# Altium PCB pay-optical-testing.PcbDoc (part 1 of 2)
Units mil, origin at the board's own origin, x right, y up, seen from the top; angles counter-clockwise.
Board outline 6000 x 4000 mil, 2 copper layers (Top Layer, Bottom Layer); 469 components, 250 nets, 1335 pads, 34 vias.
Unrouted connection lines stored in the file: 1082.
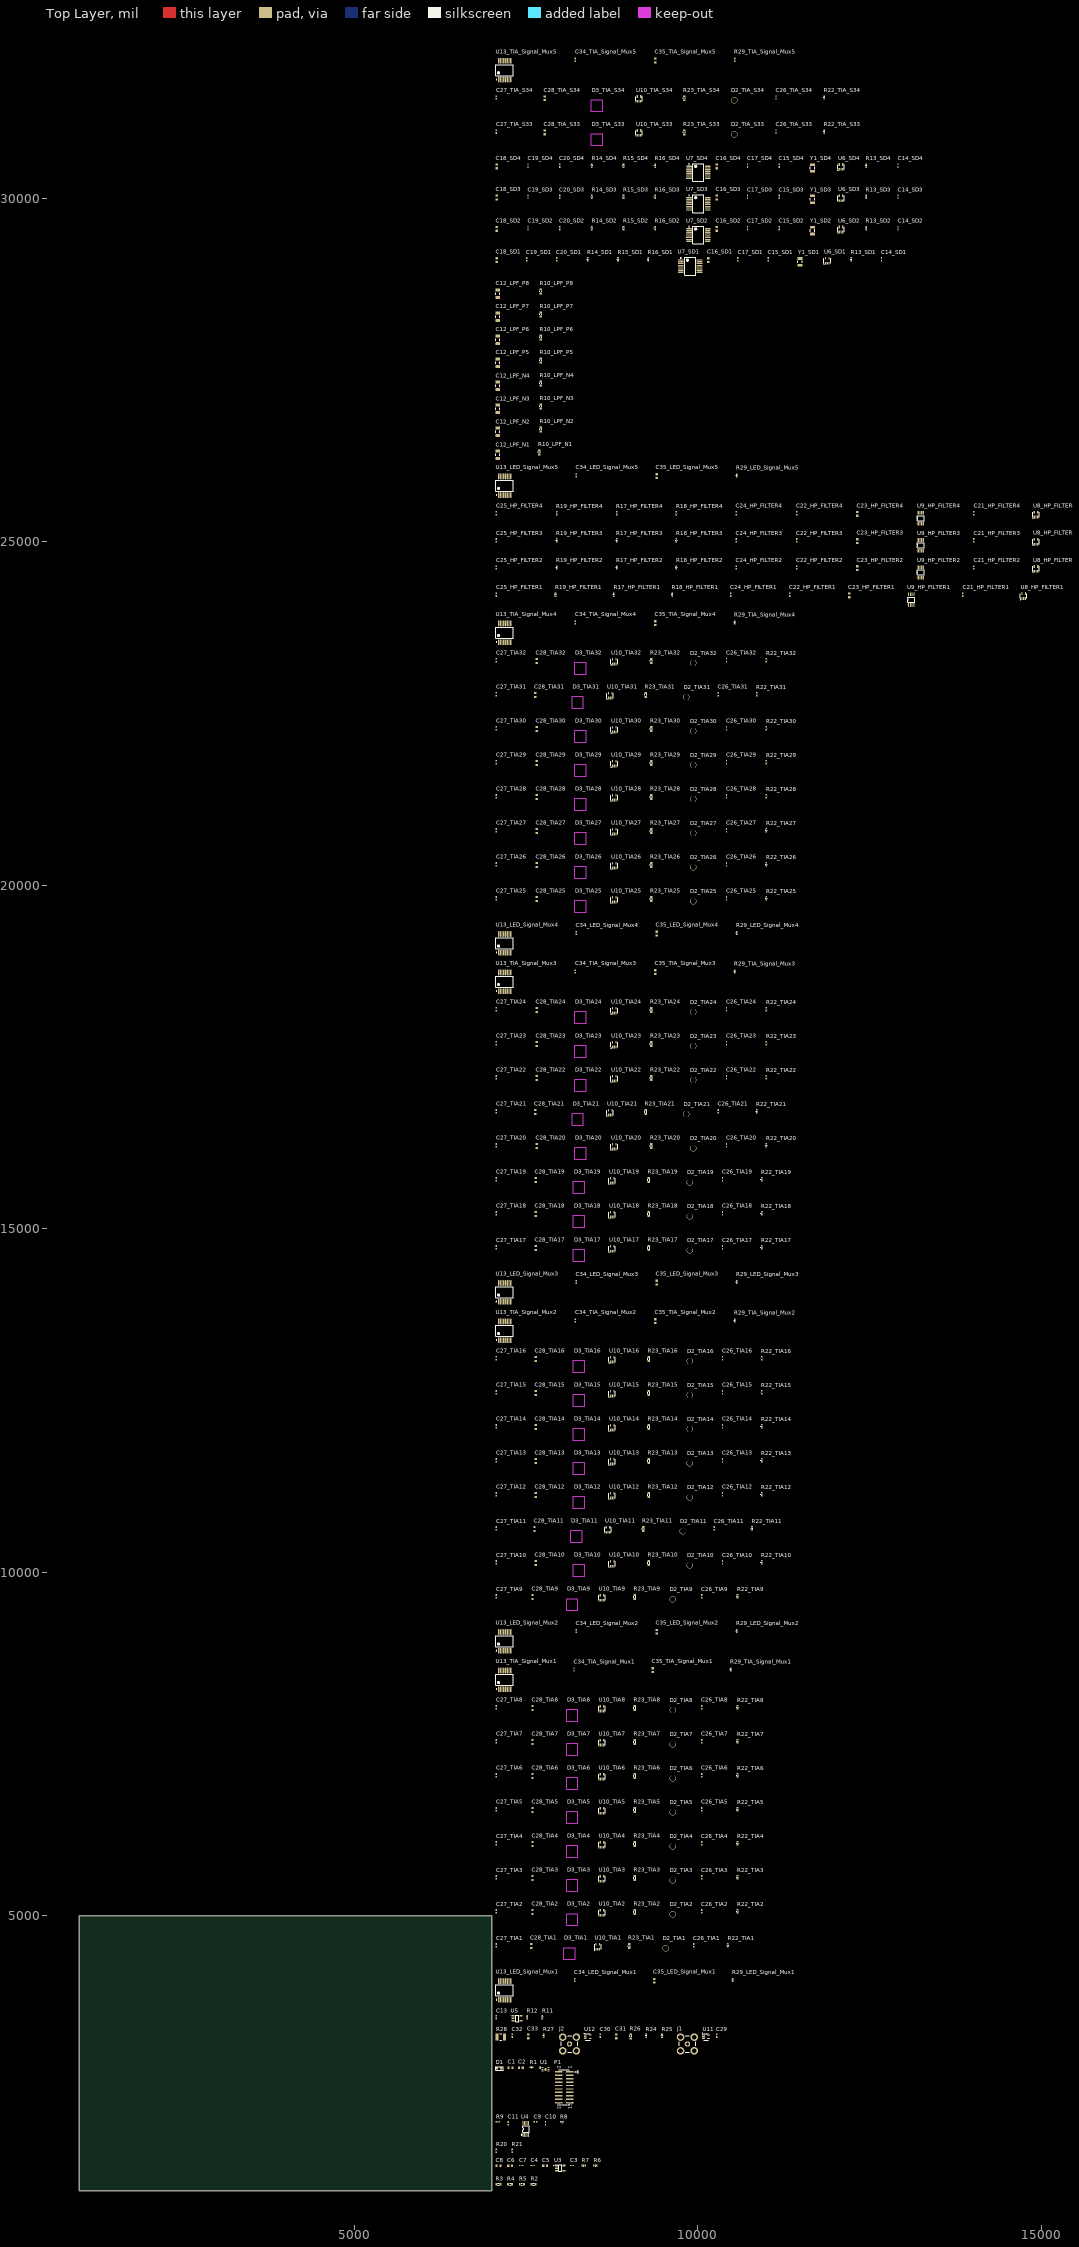
[diagram p0: Top Layer view]
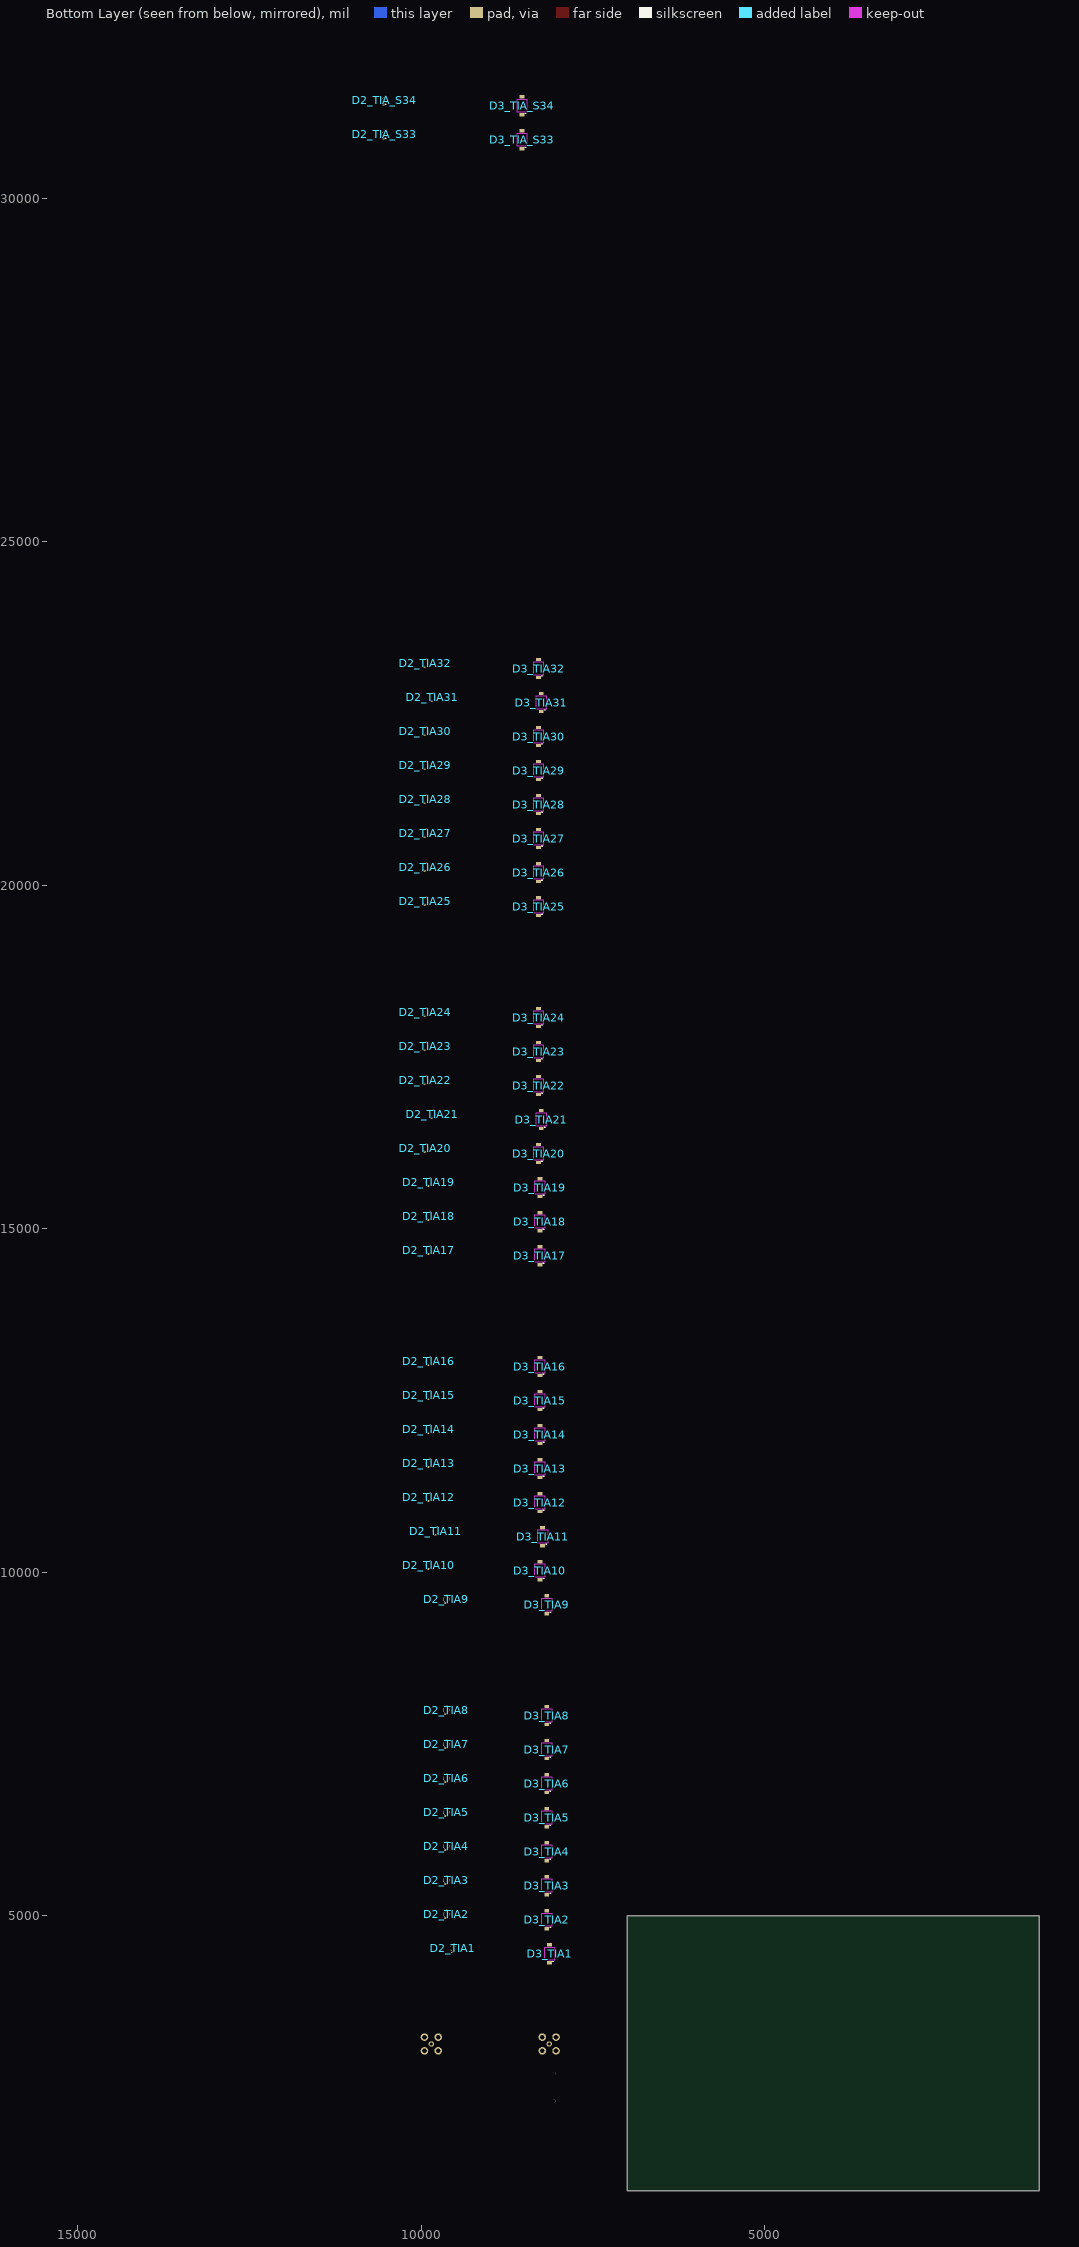
[diagram p1: Bottom Layer view, seen from below]

## Layer stack, top to bottom
Top Solder: solder mask 0.4, Solder Resist, Dk 3.5
Top Layer: signal copper 1.4
Dielectric 1: dielectric 12.6, FR-4, Dk 4.8
Bottom Layer: signal copper 1.4
Bottom Solder: solder mask 0.4, Solder Resist, Dk 3.5

## Board outline
1000,1000 7000,1000 7000,5000 1000,5000

## Design rules (kind name [scope] priority, off if disabled: settings)
Clearance [All] p1: gap=10 ignorepadtopadclearanceinfootprint=FALSE except(0: Arc-Hole Track-Hole SMDPad-Hole THPad-Hole Via-Hole Fill-Hole Poly-Hole Region-Hole Text-Hole)
PolygonConnect [All] p1: connectstyle=Relief reliefconductorwidth=10 reliefentries=4 polygonreliefangle="90 Angle" airgapwidth=10
RoomDefinition TIA_Signal_Mux5 [InComponentClass('TIA_Signal_Mux5')] p1: confinementstyle=ConfineIn formatcopy=TRUE lockcomponents=FALSE outline 7045,31670 11640,31670 11640,32180 7045,32180
RoomDefinition TIA_Signal_Mux4 [InComponentClass('TIA_Signal_Mux4')] p2: confinementstyle=ConfineIn formatcopy=TRUE lockcomponents=FALSE outline 7045,23480 11640,23480 11640,23990 7045,23990
RoomDefinition TIA_Signal_Mux3 [InComponentClass('TIA_Signal_Mux3')] p3: confinementstyle=ConfineIn formatcopy=TRUE lockcomponents=FALSE outline 7045,18400 11640,18400 11640,18910 7045,18910
RoomDefinition TIA_Signal_Mux2 [InComponentClass('TIA_Signal_Mux2')] p4: confinementstyle=ConfineIn formatcopy=TRUE lockcomponents=FALSE outline 7045,13320 11640,13320 11640,13830 7045,13830
RoomDefinition TIA_Signal_Mux1 [InComponentClass('TIA_Signal_Mux1')] p5: confinementstyle=ConfineIn formatcopy=TRUE lockcomponents=FALSE outline 7045,8240 11560,8240 11560,8750 7045,8750
RoomDefinition TIA_S34 [InComponentClass('TIA_S34')] p6: confinementstyle=ConfineIn formatcopy=TRUE lockcomponents=FALSE outline 7045,31180 12480,31180 12480,31620 7045,31620
RoomDefinition TIA_S33 [InComponentClass('TIA_S33')] p7: confinementstyle=ConfineIn formatcopy=TRUE lockcomponents=FALSE outline 7045,30685 12480,30685 12480,31125 7045,31125
RoomDefinition TIA32 [InComponentClass('TIA32')] p8: confinementstyle=ConfineIn formatcopy=TRUE lockcomponents=FALSE outline 7045,22990 11520,22990 11520,23430 7045,23430
RoomDefinition TIA31 [InComponentClass('TIA31')] p9: confinementstyle=ConfineIn formatcopy=TRUE lockcomponents=FALSE outline 7045,22495 11360,22495 11360,22935 7045,22935
RoomDefinition TIA30 [InComponentClass('TIA30')] p10: confinementstyle=ConfineIn formatcopy=TRUE lockcomponents=FALSE outline 7045,22000 11520,22000 11520,22440 7045,22440
RoomDefinition TIA29 [InComponentClass('TIA29')] p11: confinementstyle=ConfineIn formatcopy=TRUE lockcomponents=FALSE outline 7045,21505 11520,21505 11520,21945 7045,21945
RoomDefinition TIA28 [InComponentClass('TIA28')] p12: confinementstyle=ConfineIn formatcopy=TRUE lockcomponents=FALSE outline 7045,21010 11520,21010 11520,21450 7045,21450
RoomDefinition TIA27 [InComponentClass('TIA27')] p13: confinementstyle=ConfineIn formatcopy=TRUE lockcomponents=FALSE outline 7045,20515 11520,20515 11520,20955 7045,20955
RoomDefinition TIA26 [InComponentClass('TIA26')] p14: confinementstyle=ConfineIn formatcopy=TRUE lockcomponents=FALSE outline 7045,20020 11520,20020 11520,20460 7045,20460
RoomDefinition TIA25 [InComponentClass('TIA25')] p15: confinementstyle=ConfineIn formatcopy=TRUE lockcomponents=FALSE outline 7045,19525 11520,19525 11520,19965 7045,19965
RoomDefinition TIA24 [InComponentClass('TIA24')] p16: confinementstyle=ConfineIn formatcopy=TRUE lockcomponents=FALSE outline 7045,17910 11520,17910 11520,18350 7045,18350
RoomDefinition TIA23 [InComponentClass('TIA23')] p17: confinementstyle=ConfineIn formatcopy=TRUE lockcomponents=FALSE outline 7045,17415 11520,17415 11520,17855 7045,17855
RoomDefinition TIA22 [InComponentClass('TIA22')] p18: confinementstyle=ConfineIn formatcopy=TRUE lockcomponents=FALSE outline 7045,16920 11520,16920 11520,17360 7045,17360
RoomDefinition TIA21 [InComponentClass('TIA21')] p19: confinementstyle=ConfineIn formatcopy=TRUE lockcomponents=FALSE outline 7045,16425 11360,16425 11360,16865 7045,16865
RoomDefinition TIA20 [InComponentClass('TIA20')] p20: confinementstyle=ConfineIn formatcopy=TRUE lockcomponents=FALSE outline 7045,15930 11520,15930 11520,16370 7045,16370
RoomDefinition TIA19 [InComponentClass('TIA19')] p21: confinementstyle=ConfineIn formatcopy=TRUE lockcomponents=FALSE outline 7045,15435 11440,15435 11440,15875 7045,15875
RoomDefinition TIA18 [InComponentClass('TIA18')] p22: confinementstyle=ConfineIn formatcopy=TRUE lockcomponents=FALSE outline 7045,14940 11440,14940 11440,15380 7045,15380
RoomDefinition TIA17 [InComponentClass('TIA17')] p23: confinementstyle=ConfineIn formatcopy=TRUE lockcomponents=FALSE outline 7045,14445 11440,14445 11440,14885 7045,14885
RoomDefinition TIA16 [InComponentClass('TIA16')] p24: confinementstyle=ConfineIn formatcopy=TRUE lockcomponents=FALSE outline 7045,12830 11440,12830 11440,13270 7045,13270
RoomDefinition TIA15 [InComponentClass('TIA15')] p25: confinementstyle=ConfineIn formatcopy=TRUE lockcomponents=FALSE outline 7045,12335 11440,12335 11440,12775 7045,12775
RoomDefinition TIA14 [InComponentClass('TIA14')] p26: confinementstyle=ConfineIn formatcopy=TRUE lockcomponents=FALSE outline 7045,11840 11440,11840 11440,12280 7045,12280
RoomDefinition TIA13 [InComponentClass('TIA13')] p27: confinementstyle=ConfineIn formatcopy=TRUE lockcomponents=FALSE outline 7045,11345 11440,11345 11440,11785 7045,11785
RoomDefinition TIA12 [InComponentClass('TIA12')] p28: confinementstyle=ConfineIn formatcopy=TRUE lockcomponents=FALSE outline 7045,10850 11440,10850 11440,11290 7045,11290
RoomDefinition TIA11 [InComponentClass('TIA11')] p29: confinementstyle=ConfineIn formatcopy=TRUE lockcomponents=FALSE outline 7045,10355 11280,10355 11280,10795 7045,10795
RoomDefinition TIA10 [InComponentClass('TIA10')] p30: confinementstyle=ConfineIn formatcopy=TRUE lockcomponents=FALSE outline 7045,9860 11440,9860 11440,10300 7045,10300
RoomDefinition TIA9 [InComponentClass('TIA9')] p31: confinementstyle=ConfineIn formatcopy=TRUE lockcomponents=FALSE outline 7045,9365 11040,9365 11040,9805 7045,9805
RoomDefinition TIA8 [InComponentClass('TIA8')] p32: confinementstyle=ConfineIn formatcopy=TRUE lockcomponents=FALSE outline 7045,7750 11040,7750 11040,8190 7045,8190
RoomDefinition TIA7 [InComponentClass('TIA7')] p33: confinementstyle=ConfineIn formatcopy=TRUE lockcomponents=FALSE outline 7045,7255 11040,7255 11040,7695 7045,7695
RoomDefinition TIA6 [InComponentClass('TIA6')] p34: confinementstyle=ConfineIn formatcopy=TRUE lockcomponents=FALSE outline 7045,6760 11040,6760 11040,7200 7045,7200
RoomDefinition TIA5 [InComponentClass('TIA5')] p35: confinementstyle=ConfineIn formatcopy=TRUE lockcomponents=FALSE outline 7045,6265 11040,6265 11040,6705 7045,6705
RoomDefinition TIA4 [InComponentClass('TIA4')] p36: confinementstyle=ConfineIn formatcopy=TRUE lockcomponents=FALSE outline 7045,5770 11040,5770 11040,6210 7045,6210
RoomDefinition TIA3 [InComponentClass('TIA3')] p37: confinementstyle=ConfineIn formatcopy=TRUE lockcomponents=FALSE outline 7045,5275 11040,5275 11040,5715 7045,5715
RoomDefinition TIA2 [InComponentClass('TIA2')] p38: confinementstyle=ConfineIn formatcopy=TRUE lockcomponents=FALSE outline 7045,4780 11040,4780 11040,5220 7045,5220
RoomDefinition TIA1 [InComponentClass('TIA1')] p39: confinementstyle=ConfineIn formatcopy=TRUE lockcomponents=FALSE outline 7045,4285 10880,4285 10880,4725 7045,4725
RoomDefinition "Synchronous Demodulator Circuit" [InComponentClass('Synchronous Demodulator Circuit')] p40: confinementstyle=ConfineIn formatcopy=TRUE lockcomponents=FALSE outline 7045,3445 7880,3445 7880,3670 7045,3670
RoomDefinition "SMA Amp" [InComponentClass('SMA Amp')] p41: confinementstyle=ConfineIn formatcopy=TRUE lockcomponents=FALSE outline 7045,2970 10445,2970 10445,3400 7045,3400
RoomDefinition SD4 [InComponentClass('SD4')] p42: confinementstyle=ConfineIn formatcopy=TRUE lockcomponents=FALSE outline 7045,30230 13315,30230 13315,30630 7045,30630
RoomDefinition SD3 [InComponentClass('SD3')] p43: confinementstyle=ConfineIn formatcopy=TRUE lockcomponents=FALSE outline 7045,29775 13315,29775 13315,30175 7045,30175
RoomDefinition SD2 [InComponentClass('SD2')] p44: confinementstyle=ConfineIn formatcopy=TRUE lockcomponents=FALSE outline 7045,29320 13315,29320 13315,29720 7045,29720
RoomDefinition SD1 [InComponentClass('SD1')] p45: confinementstyle=ConfineIn formatcopy=TRUE lockcomponents=FALSE outline 7045,28865 13055,28865 13055,29265 7045,29265
RoomDefinition pay-optical-toplevel [InComponentClass('pay-optical-toplevel')] p46: confinementstyle=ConfineIn formatcopy=TRUE lockcomponents=FALSE outline 7045,2175 8270,2175 8270,2920 7045,2920
RoomDefinition LPF_P8 [InComponentClass('LPF_P8')] p47: confinementstyle=ConfineIn formatcopy=TRUE lockcomponents=FALSE outline 7045,28520 8290,28520 8290,28810 7045,28810
RoomDefinition LPF_P7 [InComponentClass('LPF_P7')] p48: confinementstyle=ConfineIn formatcopy=TRUE lockcomponents=FALSE outline 7045,28185 8290,28185 8290,28475 7045,28475
RoomDefinition LPF_P6 [InComponentClass('LPF_P6')] p49: confinementstyle=ConfineIn formatcopy=TRUE lockcomponents=FALSE outline 7045,27850 8290,27850 8290,28140 7045,28140
RoomDefinition LPF_P5 [InComponentClass('LPF_P5')] p50: confinementstyle=ConfineIn formatcopy=TRUE lockcomponents=FALSE outline 7045,27515 8290,27515 8290,27805 7045,27805
RoomDefinition LPF_N4 [InComponentClass('LPF_N4')] p51: confinementstyle=ConfineIn formatcopy=TRUE lockcomponents=FALSE outline 7045,27180 8290,27180 8290,27470 7045,27470
RoomDefinition LPF_N3 [InComponentClass('LPF_N3')] p52: confinementstyle=ConfineIn formatcopy=TRUE lockcomponents=FALSE outline 7045,26845 8290,26845 8290,27135 7045,27135
RoomDefinition LPF_N2 [InComponentClass('LPF_N2')] p53: confinementstyle=ConfineIn formatcopy=TRUE lockcomponents=FALSE outline 7045,26510 8290,26510 8290,26800 7045,26800
RoomDefinition LPF_N1 [InComponentClass('LPF_N1')] p54: confinementstyle=ConfineIn formatcopy=TRUE lockcomponents=FALSE outline 7045,26175 8250,26175 8250,26465 7045,26465
RoomDefinition LED_Signal_Mux5 [InComponentClass('LED_Signal_Mux5')] p55: confinementstyle=ConfineIn formatcopy=TRUE lockcomponents=FALSE outline 7045,25620 11680,25620 11680,26130 7045,26130
RoomDefinition LED_Signal_Mux4 [InComponentClass('LED_Signal_Mux4')] p56: confinementstyle=ConfineIn formatcopy=TRUE lockcomponents=FALSE outline 7045,18960 11680,18960 11680,19470 7045,19470
RoomDefinition LED_Signal_Mux3 [InComponentClass('LED_Signal_Mux3')] p57: confinementstyle=ConfineIn formatcopy=TRUE lockcomponents=FALSE outline 7045,13880 11680,13880 11680,14390 7045,14390
RoomDefinition LED_Signal_Mux2 [InComponentClass('LED_Signal_Mux2')] p58: confinementstyle=ConfineIn formatcopy=TRUE lockcomponents=FALSE outline 7045,8800 11680,8800 11680,9310 7045,9310
RoomDefinition LED_Signal_Mux1 [InComponentClass('LED_Signal_Mux1')] p59: confinementstyle=ConfineIn formatcopy=TRUE lockcomponents=FALSE outline 7045,3720 11600,3720 11600,4230 7045,4230
RoomDefinition HP_FILTER4 [InComponentClass('HP_FILTER4')] p60: confinementstyle=ConfineIn formatcopy=TRUE lockcomponents=FALSE outline 7045,25225 15650,25225 15650,25570 7045,25570
RoomDefinition HP_FILTER3 [InComponentClass('HP_FILTER3')] p61: confinementstyle=ConfineIn formatcopy=TRUE lockcomponents=FALSE outline 7045,24830 15650,24830 15650,25175 7045,25175
RoomDefinition HP_FILTER2 [InComponentClass('HP_FILTER2')] p62: confinementstyle=ConfineIn formatcopy=TRUE lockcomponents=FALSE outline 7045,24435 15650,24435 15650,24780 7045,24780
RoomDefinition HP_FILTER1 [InComponentClass('HP_FILTER1')] p63: confinementstyle=ConfineIn formatcopy=TRUE lockcomponents=FALSE outline 7045,24040 15450,24040 15450,24385 7045,24385
RoomDefinition Designator [InComponentClass('Designator')] p64: confinementstyle=ConfineIn formatcopy=TRUE lockcomponents=FALSE outline 7045,1770 8115,1770 8115,2125 7045,2125
RoomDefinition CH5 [InComponentClass('CH5')] p65: confinementstyle=ConfineIn formatcopy=TRUE lockcomponents=FALSE outline 7045,1535 7450,1535 7450,1725 7045,1725
RoomDefinition "ADC Converter" [InComponentClass('ADC Converter')] p66: confinementstyle=ConfineIn formatcopy=TRUE lockcomponents=FALSE outline 7045,1265 8600,1265 8600,1490 7045,1490
RoomDefinition ADC [InComponentClass('ADC')] p67: confinementstyle=ConfineIn formatcopy=TRUE lockcomponents=FALSE outline 7045,1060 7690,1060 7690,1220 7045,1220
RoutingVias [All] p1: holewidth=28 width=50 viastyle="Through Hole" minholewidth=28 minwidth=50 maxholewidth=28 maxwidth=50
SolderMaskExpansion [All] p1: expansion=4
Width [All] p1: maxlimit=10 minlimit=10 preferedwidth=10
30 further rules are at their usual default settings.

## Classes and differential pairs
channel class tia-channel-selection: CH1 CH2 CH3 CH4
channel class sync-demod-ic: SD1 SD2 SD3 SD4
channel class photodiode-amplifier: TIA1 TIA2 TIA3 TIA4 TIA5 TIA6 TIA7 TIA8 TIA9 TIA10 TIA11 TIA12 TIA13 TIA14 TIA15 TIA16 TIA17 TIA18 TIA19 TIA20 TIA21 TIA22 TIA23 TIA24 TIA25 TIA26 TIA27 TIA28 TIA29 TIA30 TIA31 TIA32 TIA_S33 TIA_S34
channel class multiplexer-ic: LED_Signal_Mux1 LED_Signal_Mux2 LED_Signal_Mux3 LED_Signal_Mux4 LED_Signal_Mux5 TIA_Signal_Mux1 TIA_Signal_Mux2 TIA_Signal_Mux3 TIA_Signal_Mux4 TIA_Signal_Mux5
channel class lowpass-adc-input: LPF_N1 LPF_N2 LPF_N3 LPF_N4 LPF_P5 LPF_P6 LPF_P7 LPF_P8
channel class highpass-filter-conditioning: HP_FILTER1 HP_FILTER2 HP_FILTER3 HP_FILTER4
net class TIASigOut[1..4]: TIASigOut1 TIASigOut2 TIASigOut3 TIASigOut4
net class SYNCO[1..4]: SYNCO1 SYNCO2 SYNCO3 SYNCO4
net class SDSigIn[1..4]: SDSigIn1 SDSigIn2 SDSigIn3 SDSigIn4
net class SDOutP[1..4]: SDOutP1 SDOutP2 SDOutP3 SDOutP4
net class SDOutN[1..4]: SDOutN1 SDOutN2 SDOutN3 SDOutN4
net class SD_CSn[1..4]: SD_CSn1 SD_CSn2 SD_CSn3 SD_CSn4
net class S_TIA[1..2]: S_TIA1 S_TIA2
net class S_FL_LED[1..2]: S_FL_LED1 S_FL_LED2
net class REFSigO[1..4]: REFSigO1 REFSigO2 REFSigO3 REFSigO4
net class LPF_P[1..4]: LPF_P1 LPF_P2 LPF_P3 LPF_P4
net class LPF_N[1..4]: LPF_N1 LPF_N2 LPF_N3 LPF_N4
net class LED_Sig[1..4]: LED_Sig1 LED_Sig2 LED_Sig3 LED_Sig4
component class TIA_Signal_Mux5: C34_TIA_Signal_Mux5 C35_TIA_Signal_Mux5 R29_TIA_Signal_Mux5 U13_TIA_Signal_Mux5
component class TIA_Signal_Mux4: C34_TIA_Signal_Mux4 C35_TIA_Signal_Mux4 R29_TIA_Signal_Mux4 U13_TIA_Signal_Mux4
component class TIA_Signal_Mux3: C34_TIA_Signal_Mux3 C35_TIA_Signal_Mux3 R29_TIA_Signal_Mux3 U13_TIA_Signal_Mux3
component class TIA_Signal_Mux2: C34_TIA_Signal_Mux2 C35_TIA_Signal_Mux2 R29_TIA_Signal_Mux2 U13_TIA_Signal_Mux2
component class TIA_Signal_Mux1: C34_TIA_Signal_Mux1 C35_TIA_Signal_Mux1 R29_TIA_Signal_Mux1 U13_TIA_Signal_Mux1
component class TIA_S34: C26_TIA_S34 C27_TIA_S34 C28_TIA_S34 D2_TIA_S34 D3_TIA_S34 R22_TIA_S34 R23_TIA_S34 U10_TIA_S34
component class TIA_S33: C26_TIA_S33 C27_TIA_S33 C28_TIA_S33 D2_TIA_S33 D3_TIA_S33 R22_TIA_S33 R23_TIA_S33 U10_TIA_S33
component class TIA32: C26_TIA32 C27_TIA32 C28_TIA32 D2_TIA32 D3_TIA32 R22_TIA32 R23_TIA32 U10_TIA32
component class TIA31: C26_TIA31 C27_TIA31 C28_TIA31 D2_TIA31 D3_TIA31 R22_TIA31 R23_TIA31 U10_TIA31
component class TIA30: C26_TIA30 C27_TIA30 C28_TIA30 D2_TIA30 D3_TIA30 R22_TIA30 R23_TIA30 U10_TIA30
component class TIA29: C26_TIA29 C27_TIA29 C28_TIA29 D2_TIA29 D3_TIA29 R22_TIA29 R23_TIA29 U10_TIA29
component class TIA28: C26_TIA28 C27_TIA28 C28_TIA28 D2_TIA28 D3_TIA28 R22_TIA28 R23_TIA28 U10_TIA28
component class TIA27: C26_TIA27 C27_TIA27 C28_TIA27 D2_TIA27 D3_TIA27 R22_TIA27 R23_TIA27 U10_TIA27
component class TIA26: C26_TIA26 C27_TIA26 C28_TIA26 D2_TIA26 D3_TIA26 R22_TIA26 R23_TIA26 U10_TIA26
component class TIA25: C26_TIA25 C27_TIA25 C28_TIA25 D2_TIA25 D3_TIA25 R22_TIA25 R23_TIA25 U10_TIA25
component class TIA24: C26_TIA24 C27_TIA24 C28_TIA24 D2_TIA24 D3_TIA24 R22_TIA24 R23_TIA24 U10_TIA24
component class TIA23: C26_TIA23 C27_TIA23 C28_TIA23 D2_TIA23 D3_TIA23 R22_TIA23 R23_TIA23 U10_TIA23
component class TIA22: C26_TIA22 C27_TIA22 C28_TIA22 D2_TIA22 D3_TIA22 R22_TIA22 R23_TIA22 U10_TIA22
component class TIA21: C26_TIA21 C27_TIA21 C28_TIA21 D2_TIA21 D3_TIA21 R22_TIA21 R23_TIA21 U10_TIA21
component class TIA20: C26_TIA20 C27_TIA20 C28_TIA20 D2_TIA20 D3_TIA20 R22_TIA20 R23_TIA20 U10_TIA20
component class TIA19: C26_TIA19 C27_TIA19 C28_TIA19 D2_TIA19 D3_TIA19 R22_TIA19 R23_TIA19 U10_TIA19
component class TIA18: C26_TIA18 C27_TIA18 C28_TIA18 D2_TIA18 D3_TIA18 R22_TIA18 R23_TIA18 U10_TIA18
component class TIA17: C26_TIA17 C27_TIA17 C28_TIA17 D2_TIA17 D3_TIA17 R22_TIA17 R23_TIA17 U10_TIA17
component class TIA16: C26_TIA16 C27_TIA16 C28_TIA16 D2_TIA16 D3_TIA16 R22_TIA16 R23_TIA16 U10_TIA16
component class TIA15: C26_TIA15 C27_TIA15 C28_TIA15 D2_TIA15 D3_TIA15 R22_TIA15 R23_TIA15 U10_TIA15
component class TIA14: C26_TIA14 C27_TIA14 C28_TIA14 D2_TIA14 D3_TIA14 R22_TIA14 R23_TIA14 U10_TIA14
component class TIA13: C26_TIA13 C27_TIA13 C28_TIA13 D2_TIA13 D3_TIA13 R22_TIA13 R23_TIA13 U10_TIA13
component class TIA12: C26_TIA12 C27_TIA12 C28_TIA12 D2_TIA12 D3_TIA12 R22_TIA12 R23_TIA12 U10_TIA12
component class TIA11: C26_TIA11 C27_TIA11 C28_TIA11 D2_TIA11 D3_TIA11 R22_TIA11 R23_TIA11 U10_TIA11
component class TIA10: C26_TIA10 C27_TIA10 C28_TIA10 D2_TIA10 D3_TIA10 R22_TIA10 R23_TIA10 U10_TIA10
component class TIA9: C26_TIA9 C27_TIA9 C28_TIA9 D2_TIA9 D3_TIA9 R22_TIA9 R23_TIA9 U10_TIA9
component class TIA8: C26_TIA8 C27_TIA8 C28_TIA8 D2_TIA8 D3_TIA8 R22_TIA8 R23_TIA8 U10_TIA8
component class TIA7: C26_TIA7 C27_TIA7 C28_TIA7 D2_TIA7 D3_TIA7 R22_TIA7 R23_TIA7 U10_TIA7
component class TIA6: C26_TIA6 C27_TIA6 C28_TIA6 D2_TIA6 D3_TIA6 R22_TIA6 R23_TIA6 U10_TIA6
component class TIA5: C26_TIA5 C27_TIA5 C28_TIA5 D2_TIA5 D3_TIA5 R22_TIA5 R23_TIA5 U10_TIA5
component class TIA4: C26_TIA4 C27_TIA4 C28_TIA4 D2_TIA4 D3_TIA4 R22_TIA4 R23_TIA4 U10_TIA4
component class TIA3: C26_TIA3 C27_TIA3 C28_TIA3 D2_TIA3 D3_TIA3 R22_TIA3 R23_TIA3 U10_TIA3
component class TIA2: C26_TIA2 C27_TIA2 C28_TIA2 D2_TIA2 D3_TIA2 R22_TIA2 R23_TIA2 U10_TIA2
component class TIA1: C26_TIA1 C27_TIA1 C28_TIA1 D2_TIA1 D3_TIA1 R22_TIA1 R23_TIA1 U10_TIA1
component class "Synchronous Demodulator Circuit": C13 R11 R12 U5
component class "SMA Amp": C29 C30 C31 C32 C33 J1 J2 R24 R25 R26 R27 R28 U11 U12
component class SD4: C14_SD4 C15_SD4 C16_SD4 C17_SD4 C18_SD4 C19_SD4 C20_SD4 R13_SD4 R14_SD4 R15_SD4 R16_SD4 U6_SD4 U7_SD4 Y1_SD4
component class SD3: C14_SD3 C15_SD3 C16_SD3 C17_SD3 C18_SD3 C19_SD3 C20_SD3 R13_SD3 R14_SD3 R15_SD3 R16_SD3 U6_SD3 U7_SD3 Y1_SD3
component class SD2: C14_SD2 C15_SD2 C16_SD2 C17_SD2 C18_SD2 C19_SD2 C20_SD2 R13_SD2 R14_SD2 R15_SD2 R16_SD2 U6_SD2 U7_SD2 Y1_SD2
component class SD1: C14_SD1 C15_SD1 C16_SD1 C17_SD1 C18_SD1 C19_SD1 C20_SD1 R13_SD1 R14_SD1 R15_SD1 R16_SD1 U6_SD1 U7_SD1 Y1_SD1
component class pay-optical-toplevel: C1 C2 D1 P1 R1 U1
component class LPF_P8: C12_LPF_P8 R10_LPF_P8
component class LPF_P7: C12_LPF_P7 R10_LPF_P7
component class LPF_P6: C12_LPF_P6 R10_LPF_P6
component class LPF_P5: C12_LPF_P5 R10_LPF_P5
component class LPF_N4: C12_LPF_N4 R10_LPF_N4
component class LPF_N3: C12_LPF_N3 R10_LPF_N3
component class LPF_N2: C12_LPF_N2 R10_LPF_N2
component class LPF_N1: C12_LPF_N1 R10_LPF_N1
component class LED_Signal_Mux5: C34_LED_Signal_Mux5 C35_LED_Signal_Mux5 R29_LED_Signal_Mux5 U13_LED_Signal_Mux5
component class LED_Signal_Mux4: C34_LED_Signal_Mux4 C35_LED_Signal_Mux4 R29_LED_Signal_Mux4 U13_LED_Signal_Mux4
component class LED_Signal_Mux3: C34_LED_Signal_Mux3 C35_LED_Signal_Mux3 R29_LED_Signal_Mux3 U13_LED_Signal_Mux3
component class LED_Signal_Mux2: C34_LED_Signal_Mux2 C35_LED_Signal_Mux2 R29_LED_Signal_Mux2 U13_LED_Signal_Mux2
component class LED_Signal_Mux1: C34_LED_Signal_Mux1 C35_LED_Signal_Mux1 R29_LED_Signal_Mux1 U13_LED_Signal_Mux1
component class HP_FILTER4: C21_HP_FILTER4 C22_HP_FILTER4 C23_HP_FILTER4 C24_HP_FILTER4 C25_HP_FILTER4 R17_HP_FILTER4 R18_HP_FILTER4 R19_HP_FILTER4 U8_HP_FILTER4 U9_HP_FILTER4
component class HP_FILTER3: C21_HP_FILTER3 C22_HP_FILTER3 C23_HP_FILTER3 C24_HP_FILTER3 C25_HP_FILTER3 R17_HP_FILTER3 R18_HP_FILTER3 R19_HP_FILTER3 U8_HP_FILTER3 U9_HP_FILTER3
component class HP_FILTER2: C21_HP_FILTER2 C22_HP_FILTER2 C23_HP_FILTER2 C24_HP_FILTER2 C25_HP_FILTER2 R17_HP_FILTER2 R18_HP_FILTER2 R19_HP_FILTER2 U8_HP_FILTER2 U9_HP_FILTER2
component class HP_FILTER1: C21_HP_FILTER1 C22_HP_FILTER1 C23_HP_FILTER1 C24_HP_FILTER1 C25_HP_FILTER1 R17_HP_FILTER1 R18_HP_FILTER1 R19_HP_FILTER1 U8_HP_FILTER1 U9_HP_FILTER1
component class Designator: C9 C10 C11 R8 R9 U4
component class CH5: R20 R21
component class ADC: R2 R3 R4 R5
component class "ADC Converter": C3 C4 C5 C6 C7 C8 R6 R7 U2 U3

## Components (designator, comment, footprint, x,y, rotation, side; value= is the part's Value field where it differs from the comment)
C1 "0.47uF" 1608[0603] 7275,2790 r0 top
C2 "0.47uF" 1608[0603] 7425,2790 r0 top
C3 "0.1uF" 0402#1 8170,1365 r0 top
C4 "0.1uF" 0402#1 7600,1365 r0 top
C5 "10uF" 1608[0603] 7780,1360 r0 top
C6 "10uF" 1608[0603] 7270,1360 r0 top
C7 "0.1uF" 0402#1 7430,1365 r0 top
C8 "4.7uF" 1608[0603] 7100,1360 r0 top
C9 "0.1uF" 0402#1 7640,2000 r0 top
C10 "100pF" 0402#1 7785,1980 r90 top
C11 "150nF" 0402#1 7240,1980 r90 top
C12_LPF_N1 "10uF" C1206 7090,26265 r90 top (schematic designator C12)
C12_LPF_N2 "10uF" C1206 7090,26600 r90 top (schematic designator C12)
C12_LPF_N3 "10uF" C1206 7090,26935 r90 top (schematic designator C12)
C12_LPF_N4 "10uF" C1206 7090,27270 r90 top (schematic designator C12)
C12_LPF_P5 "10uF" C1206 7090,27605 r90 top (schematic designator C12)
C12_LPF_P6 "10uF" C1206 7090,27940 r90 top (schematic designator C12)
C12_LPF_P7 "10uF" C1206 7090,28275 r90 top (schematic designator C12)
C12_LPF_P8 "10uF" C1206 7090,28610 r90 top (schematic designator C12)
C13 "0.1uF" 0402#1 7070,3525 r90 top
C14_SD1 "2pF" 0402#1 12675,29110 r90 top (schematic designator C14)
C14_SD2 "2pF" 0402#1 12915,29565 r90 top (schematic designator C14)
C14_SD3 "2pF" 0402#1 12915,30020 r90 top (schematic designator C14)
C14_SD4 "2pF" 0402#1 12915,30475 r90 top (schematic designator C14)
C15_SD1 "2pF" 0402#1 11025,29110 r90 top (schematic designator C15)
C15_SD2 "2pF" 0402#1 11185,29565 r90 top (schematic designator C15)
C15_SD3 "2pF" 0402#1 11185,30020 r90 top (schematic designator C15)
C15_SD4 "2pF" 0402#1 11185,30475 r90 top (schematic designator C15)
C16_SD1 "10uF" 1608[0603] 10155,29100 r90 top (schematic designator C16)
C16_SD2 "10uF" 1608[0603] 10275,29555 r90 top (schematic designator C16)
C16_SD3 "10uF" 1608[0603] 10275,30010 r90 top (schematic designator C16)
C16_SD4 "10uF" 1608[0603] 10275,30465 r90 top (schematic designator C16)
C17_SD1 "0.1uF" 0402#1 10585,29110 r90 top (schematic designator C17)
C17_SD2 "0.1uF" 0402#1 10725,29565 r90 top (schematic designator C17)
C17_SD3 "0.1uF" 0402#1 10725,30020 r90 top (schematic designator C17)
C17_SD4 "0.1uF" 0402#1 10725,30475 r90 top (schematic designator C17)
C18_SD1 "10uF" 1608[0603] 7075,29100 r90 top (schematic designator C18)
C18_SD2 "10uF" 1608[0603] 7075,29555 r90 top (schematic designator C18)
C18_SD3 "10uF" 1608[0603] 7075,30010 r90 top (schematic designator C18)
C18_SD4 "10uF" 1608[0603] 7075,30465 r90 top (schematic designator C18)
C19_SD1 "0.1uF" 0402#1 7510,29110 r90 top (schematic designator C19)
C19_SD2 "0.1uF" 0402#1 7530,29565 r90 top (schematic designator C19)
C19_SD3 "0.1uF" 0402#1 7530,30020 r90 top (schematic designator C19)
C19_SD4 "0.1uF" 0402#1 7530,30475 r90 top (schematic designator C19)
C20_SD1 "0.1uF" 0402#1 7950,29110 r90 top (schematic designator C20)
C20_SD2 "0.1uF" 0402#1 7990,29565 r90 top (schematic designator C20)
C20_SD3 "0.1uF" 0402#1 7990,30020 r90 top (schematic designator C20)
C20_SD4 "0.1uF" 0402#1 7990,30475 r90 top (schematic designator C20)
C21_HP_FILTER1 "0.1uF" 0402#1 13860,24230 r90 top (schematic designator C21)
C21_HP_FILTER2 "0.1uF" 0402#1 14020,24625 r90 top (schematic designator C21)
C21_HP_FILTER3 "0.1uF" 0402#1 14020,25020 r90 top (schematic designator C21)
C21_HP_FILTER4 "0.1uF" 0402#1 14020,25415 r90 top (schematic designator C21)
C22_HP_FILTER1 "0.1uF" 0402#1 11340,24230 r90 top (schematic designator C22)
C22_HP_FILTER2 "0.1uF" 0402#1 11440,24625 r90 top (schematic designator C22)
C22_HP_FILTER3 "0.1uF" 0402#1 11440,25020 r90 top (schematic designator C22)
C22_HP_FILTER4 "0.1uF" 0402#1 11440,25415 r90 top (schematic designator C22)
C23_HP_FILTER1 "10uF" 1608[0603] 12205,24220 r90 top (schematic designator C23)
C23_HP_FILTER2 "10uF" 1608[0603] 12325,24615 r90 top (schematic designator C23)
C23_HP_FILTER3 "10uF" 1608[0603] 12325,25010 r90 top (schematic designator C23)
C23_HP_FILTER4 "10uF" 1608[0603] 12325,25405 r90 top (schematic designator C23)
C24_HP_FILTER1 "0.1uF" 0402#1 10480,24230 r90 top (schematic designator C24)
C24_HP_FILTER2 "0.1uF" 0402#1 10560,24625 r90 top (schematic designator C24)
C24_HP_FILTER3 "0.1uF" 0402#1 10560,25020 r90 top (schematic designator C24)
C24_HP_FILTER4 "0.1uF" 0402#1 10560,25415 r90 top (schematic designator C24)
C25_HP_FILTER1 "0.1uF" 0402#1 7070,24230 r90 top (schematic designator C25)
C25_HP_FILTER2 "0.1uF" 0402#1 7070,24625 r90 top (schematic designator C25)
C25_HP_FILTER3 "0.1uF" 0402#1 7070,25020 r90 top (schematic designator C25)
C25_HP_FILTER4 "0.1uF" 0402#1 7070,25415 r90 top (schematic designator C25)
C26_TIA1 "1pF" 0402#1 9940,4570 r90 top (schematic designator C26)
C26_TIA2 "1pF" 0402#1 10060,5065 r90 top (schematic designator C26)
C26_TIA3 "1pF" 0402#1 10060,5560 r90 top (schematic designator C26)
C26_TIA4 "1pF" 0402#1 10060,6055 r90 top (schematic designator C26)
C26_TIA5 "1pF" 0402#1 10060,6550 r90 top (schematic designator C26)
C26_TIA6 "1pF" 0402#1 10060,7045 r90 top (schematic designator C26)
C26_TIA7 "1pF" 0402#1 10060,7540 r90 top (schematic designator C26)
C26_TIA8 "1pF" 0402#1 10060,8035 r90 top (schematic designator C26)
C26_TIA9 "1pF" 0402#1 10060,9650 r90 top (schematic designator C26)
C26_TIA10 "1pF" 0402#1 10360,10145 r90 top (schematic designator C26)
C26_TIA11 "1pF" 0402#1 10240,10640 r90 top (schematic designator C26)
C26_TIA12 "1pF" 0402#1 10360,11135 r90 top (schematic designator C26)
C26_TIA13 "1pF" 0402#1 10360,11630 r90 top (schematic designator C26)
C26_TIA14 "1pF" 0402#1 10360,12125 r90 top (schematic designator C26)
C26_TIA15 "1pF" 0402#1 10360,12620 r90 top (schematic designator C26)
C26_TIA16 "1pF" 0402#1 10360,13115 r90 top (schematic designator C26)
C26_TIA17 "1pF" 0402#1 10360,14730 r90 top (schematic designator C26)
C26_TIA18 "1pF" 0402#1 10360,15225 r90 top (schematic designator C26)
C26_TIA19 "1pF" 0402#1 10360,15720 r90 top (schematic designator C26)
C26_TIA20 "1pF" 0402#1 10420,16215 r90 top (schematic designator C26)
C26_TIA21 "1pF" 0402#1 10300,16710 r90 top (schematic designator C26)
C26_TIA22 "1pF" 0402#1 10420,17205 r90 top (schematic designator C26)
C26_TIA23 "1pF" 0402#1 10420,17700 r90 top (schematic designator C26)
C26_TIA24 "1pF" 0402#1 10420,18195 r90 top (schematic designator C26)
C26_TIA25 "1pF" 0402#1 10420,19810 r90 top (schematic designator C26)
C26_TIA26 "1pF" 0402#1 10420,20305 r90 top (schematic designator C26)
C26_TIA27 "1pF" 0402#1 10420,20800 r90 top (schematic designator C26)
C26_TIA28 "1pF" 0402#1 10420,21295 r90 top (schematic designator C26)
C26_TIA29 "1pF" 0402#1 10420,21790 r90 top (schematic designator C26)
C26_TIA30 "1pF" 0402#1 10420,22285 r90 top (schematic designator C26)
C26_TIA31 "1pF" 0402#1 10300,22780 r90 top (schematic designator C26)
C26_TIA32 "1pF" 0402#1 10420,23275 r90 top (schematic designator C26)
C26_TIA_S33 "1pF" 0402#1 11140,30970 r90 top (schematic designator C26)
C26_TIA_S34 "1pF" 0402#1 11140,31465 r90 top (schematic designator C26)
C27_TIA1 "0.1uF" 0402#1 7070,4570 r90 top (schematic designator C27)
C27_TIA2 "0.1uF" 0402#1 7070,5065 r90 top (schematic designator C27)
C27_TIA3 "0.1uF" 0402#1 7070,5560 r90 top (schematic designator C27)
C27_TIA4 "0.1uF" 0402#1 7070,6055 r90 top (schematic designator C27)
C27_TIA5 "0.1uF" 0402#1 7070,6550 r90 top (schematic designator C27)
C27_TIA6 "0.1uF" 0402#1 7070,7045 r90 top (schematic designator C27)
C27_TIA7 "0.1uF" 0402#1 7070,7540 r90 top (schematic designator C27)
C27_TIA8 "0.1uF" 0402#1 7070,8035 r90 top (schematic designator C27)
C27_TIA9 "0.1uF" 0402#1 7070,9650 r90 top (schematic designator C27)
C27_TIA10 "0.1uF" 0402#1 7070,10145 r90 top (schematic designator C27)
C27_TIA11 "0.1uF" 0402#1 7070,10640 r90 top (schematic designator C27)
C27_TIA12 "0.1uF" 0402#1 7070,11135 r90 top (schematic designator C27)
C27_TIA13 "0.1uF" 0402#1 7070,11630 r90 top (schematic designator C27)
C27_TIA14 "0.1uF" 0402#1 7070,12125 r90 top (schematic designator C27)
C27_TIA15 "0.1uF" 0402#1 7070,12620 r90 top (schematic designator C27)
C27_TIA16 "0.1uF" 0402#1 7070,13115 r90 top (schematic designator C27)
C27_TIA17 "0.1uF" 0402#1 7070,14730 r90 top (schematic designator C27)
C27_TIA18 "0.1uF" 0402#1 7070,15225 r90 top (schematic designator C27)
C27_TIA19 "0.1uF" 0402#1 7070,15720 r90 top (schematic designator C27)
C27_TIA20 "0.1uF" 0402#1 7070,16215 r90 top (schematic designator C27)
C27_TIA21 "0.1uF" 0402#1 7070,16710 r90 top (schematic designator C27)
C27_TIA22 "0.1uF" 0402#1 7070,17205 r90 top (schematic designator C27)
C27_TIA23 "0.1uF" 0402#1 7070,17700 r90 top (schematic designator C27)
C27_TIA24 "0.1uF" 0402#1 7070,18195 r90 top (schematic designator C27)
C27_TIA25 "0.1uF" 0402#1 7070,19810 r90 top (schematic designator C27)
C27_TIA26 "0.1uF" 0402#1 7070,20305 r90 top (schematic designator C27)
C27_TIA27 "0.1uF" 0402#1 7070,20800 r90 top (schematic designator C27)
C27_TIA28 "0.1uF" 0402#1 7070,21295 r90 top (schematic designator C27)
C27_TIA29 "0.1uF" 0402#1 7070,21790 r90 top (schematic designator C27)
C27_TIA30 "0.1uF" 0402#1 7070,22285 r90 top (schematic designator C27)
C27_TIA31 "0.1uF" 0402#1 7070,22780 r90 top (schematic designator C27)
C27_TIA32 "0.1uF" 0402#1 7070,23275 r90 top (schematic designator C27)
C27_TIA_S33 "0.1uF" 0402#1 7070,30970 r90 top (schematic designator C27)
C27_TIA_S34 "0.1uF" 0402#1 7070,31465 r90 top (schematic designator C27)
C28_TIA1 "1uF" 1608[0603] 7575,4560 r90 top (schematic designator C28)
C28_TIA2 "1uF" 1608[0603] 7595,5055 r90 top (schematic designator C28)
C28_TIA3 "1uF" 1608[0603] 7595,5550 r90 top (schematic designator C28)
C28_TIA4 "1uF" 1608[0603] 7595,6045 r90 top (schematic designator C28)
C28_TIA5 "1uF" 1608[0603] 7595,6540 r90 top (schematic designator C28)
C28_TIA6 "1uF" 1608[0603] 7595,7035 r90 top (schematic designator C28)
C28_TIA7 "1uF" 1608[0603] 7595,7530 r90 top (schematic designator C28)
C28_TIA8 "1uF" 1608[0603] 7595,8025 r90 top (schematic designator C28)
C28_TIA9 "1uF" 1608[0603] 7595,9640 r90 top (schematic designator C28)
C28_TIA10 "1uF" 1608[0603] 7645,10135 r90 top (schematic designator C28)
C28_TIA11 "1uF" 1608[0603] 7625,10630 r90 top (schematic designator C28)
C28_TIA12 "1uF" 1608[0603] 7645,11125 r90 top (schematic designator C28)
C28_TIA13 "1uF" 1608[0603] 7645,11620 r90 top (schematic designator C28)
C28_TIA14 "1uF" 1608[0603] 7645,12115 r90 top (schematic designator C28)
C28_TIA15 "1uF" 1608[0603] 7645,12610 r90 top (schematic designator C28)
C28_TIA16 "1uF" 1608[0603] 7645,13105 r90 top (schematic designator C28)
C28_TIA17 "1uF" 1608[0603] 7645,14720 r90 top (schematic designator C28)
C28_TIA18 "1uF" 1608[0603] 7645,15215 r90 top (schematic designator C28)
C28_TIA19 "1uF" 1608[0603] 7645,15710 r90 top (schematic designator C28)
C28_TIA20 "1uF" 1608[0603] 7655,16205 r90 top (schematic designator C28)
C28_TIA21 "1uF" 1608[0603] 7635,16700 r90 top (schematic designator C28)
C28_TIA22 "1uF" 1608[0603] 7655,17195 r90 top (schematic designator C28)
C28_TIA23 "1uF" 1608[0603] 7655,17690 r90 top (schematic designator C28)
C28_TIA24 "1uF" 1608[0603] 7655,18185 r90 top (schematic designator C28)
C28_TIA25 "1uF" 1608[0603] 7655,19800 r90 top (schematic designator C28)
C28_TIA26 "1uF" 1608[0603] 7655,20295 r90 top (schematic designator C28)
C28_TIA27 "1uF" 1608[0603] 7655,20790 r90 top (schematic designator C28)
C28_TIA28 "1uF" 1608[0603] 7655,21285 r90 top (schematic designator C28)
C28_TIA29 "1uF" 1608[0603] 7655,21780 r90 top (schematic designator C28)
C28_TIA30 "1uF" 1608[0603] 7655,22275 r90 top (schematic designator C28)
C28_TIA31 "1uF" 1608[0603] 7635,22770 r90 top (schematic designator C28)
C28_TIA32 "1uF" 1608[0603] 7655,23265 r90 top (schematic designator C28)
C28_TIA_S33 "1uF" 1608[0603] 7775,30960 r90 top (schematic designator C28)
C28_TIA_S34 "1uF" 1608[0603] 7775,31455 r90 top (schematic designator C28)
C29 "1pF" 0402#1 10275,3255 r90 top
C30 "0.1uF" 0402#1 8580,3255 r90 top
C31 "1uF" 1608[0603] 8815,3245 r90 top
C32 "0.1uF" 0402#1 7300,3255 r90 top
C33 "1uF" 1608[0603] 7535,3245 r90 top
C34_LED_Signal_Mux1 "0.1uF" 0402#1 8210,4065 r90 top (schematic designator C34)
C34_LED_Signal_Mux2 "0.1uF" 0402#1 8230,9145 r90 top (schematic designator C34)
C34_LED_Signal_Mux3 "0.1uF" 0402#1 8230,14225 r90 top (schematic designator C34)
C34_LED_Signal_Mux4 "0.1uF" 0402#1 8230,19305 r90 top (schematic designator C34)
C34_LED_Signal_Mux5 "0.1uF" 0402#1 8230,25965 r90 top (schematic designator C34)
C34_TIA_Signal_Mux1 "0.1uF" 0402#1 8200,8585 r90 top (schematic designator C34)
C34_TIA_Signal_Mux2 "0.1uF" 0402#1 8220,13665 r90 top (schematic designator C34)
C34_TIA_Signal_Mux3 "0.1uF" 0402#1 8220,18745 r90 top (schematic designator C34)
C34_TIA_Signal_Mux4 "0.1uF" 0402#1 8220,23825 r90 top (schematic designator C34)
C34_TIA_Signal_Mux5 "0.1uF" 0402#1 8220,32015 r90 top (schematic designator C34)
C35_LED_Signal_Mux1 "10uF" 1608[0603] 9365,4055 r90 top (schematic designator C35)
C35_LED_Signal_Mux2 "10uF" 1608[0603] 9405,9135 r90 top (schematic designator C35)
C35_LED_Signal_Mux3 "10uF" 1608[0603] 9405,14215 r90 top (schematic designator C35)
C35_LED_Signal_Mux4 "10uF" 1608[0603] 9405,19295 r90 top (schematic designator C35)
C35_LED_Signal_Mux5 "10uF" 1608[0603] 9405,25955 r90 top (schematic designator C35)
C35_TIA_Signal_Mux1 "10uF" 1608[0603] 9345,8575 r90 top (schematic designator C35)
C35_TIA_Signal_Mux2 "10uF" 1608[0603] 9385,13655 r90 top (schematic designator C35)
C35_TIA_Signal_Mux3 "10uF" 1608[0603] 9385,18735 r90 top (schematic designator C35)
C35_TIA_Signal_Mux4 "10uF" 1608[0603] 9385,23815 r90 top (schematic designator C35)
C35_TIA_Signal_Mux5 "10uF" 1608[0603] 9385,32005 r90 top (schematic designator C35)
D1 "Blue LED" 0603-LED 7110,2780 r0 top
D2_TIA1 "470nm LED" "LB P4SG" 9535,4530 r90 top (schematic designator D2)
D2_TIA2 "470nm LED" "LB P4SG" 9635,5025 r90 top (schematic designator D2)
D2_TIA3 "470nm LED" "LB P4SG" 9635,5520 r90 top (schematic designator D2)
D2_TIA4 "470nm LED" "LB P4SG" 9635,6015 r90 top (schematic designator D2)
D2_TIA5 "470nm LED" "LB P4SG" 9635,6510 r90 top (schematic designator D2)
D2_TIA6 "470nm LED" "LB P4SG" 9635,7005 r90 top (schematic designator D2)
D2_TIA7 "470nm LED" "LB P4SG" 9635,7500 r90 top (schematic designator D2)
D2_TIA8 "470nm LED" "LB P4SG" 9635,7995 r90 top (schematic designator D2)
D2_TIA9 "470nm LED" "LB P4SG" 9635,9610 r90 top (schematic designator D2)
D2_TIA10 "470nm LED" "LB P4SG" 9885,10105 r90 top (schematic designator D2)
D2_TIA11 "470nm LED" "LB P4SG" 9785,10600 r90 top (schematic designator D2)
D2_TIA12 "470nm LED" "LB P4SG" 9885,11095 r90 top (schematic designator D2)
D2_TIA13 "470nm LED" "LB P4SG" 9885,11590 r90 top (schematic designator D2)
D2_TIA14 "470nm LED" "LB P4SG" 9885,12085 r90 top (schematic designator D2)
D2_TIA15 "470nm LED" "LB P4SG" 9885,12580 r90 top (schematic designator D2)
D2_TIA16 "470nm LED" "LB P4SG" 9885,13075 r90 top (schematic designator D2)
D2_TIA17 "470nm LED" "LB P4SG" 9885,14690 r90 top (schematic designator D2)
D2_TIA18 "470nm LED" "LB P4SG" 9885,15185 r90 top (schematic designator D2)
D2_TIA19 "470nm LED" "LB P4SG" 9885,15680 r90 top (schematic designator D2)
D2_TIA20 "470nm LED" "LB P4SG" 9935,16175 r90 top (schematic designator D2)
D2_TIA21 "470nm LED" "LB P4SG" 9835,16670 r90 top (schematic designator D2)
D2_TIA22 "470nm LED" "LB P4SG" 9935,17165 r90 top (schematic designator D2)
D2_TIA23 "470nm LED" "LB P4SG" 9935,17660 r90 top (schematic designator D2)
D2_TIA24 "470nm LED" "LB P4SG" 9935,18155 r90 top (schematic designator D2)
D2_TIA25 "470nm LED" "LB P4SG" 9935,19770 r90 top (schematic designator D2)
D2_TIA26 "470nm LED" "LB P4SG" 9935,20265 r90 top (schematic designator D2)
D2_TIA27 "470nm LED" "LB P4SG" 9935,20760 r90 top (schematic designator D2)
D2_TIA28 "470nm LED" "LB P4SG" 9935,21255 r90 top (schematic designator D2)
D2_TIA29 "470nm LED" "LB P4SG" 9935,21750 r90 top (schematic designator D2)
D2_TIA30 "470nm LED" "LB P4SG" 9935,22245 r90 top (schematic designator D2)
D2_TIA31 "470nm LED" "LB P4SG" 9835,22740 r90 top (schematic designator D2)
D2_TIA32 "470nm LED" "LB P4SG" 9935,23235 r90 top (schematic designator D2)
D2_TIA_S33 "470nm LED" "LB P4SG" 10530,30930 r90 top (schematic designator D2)
D2_TIA_S34 "470nm LED" "LB P4SG" 10530,31425 r90 top (schematic designator D2)
D3_TIA1 "PIN Photodiode" VBPW34SR 8130,4450 r90 top (schematic designator D3)
D3_TIA2 "PIN Photodiode" VBPW34SR 8170,4945 r90 top (schematic designator D3)
D3_TIA3 "PIN Photodiode" VBPW34SR 8170,5440 r90 top (schematic designator D3)
D3_TIA4 "PIN Photodiode" VBPW34SR 8170,5935 r90 top (schematic designator D3)
D3_TIA5 "PIN Photodiode" VBPW34SR 8170,6430 r90 top (schematic designator D3)
D3_TIA6 "PIN Photodiode" VBPW34SR 8170,6925 r90 top (schematic designator D3)
D3_TIA7 "PIN Photodiode" VBPW34SR 8170,7420 r90 top (schematic designator D3)
D3_TIA8 "PIN Photodiode" VBPW34SR 8170,7915 r90 top (schematic designator D3)
D3_TIA9 "PIN Photodiode" VBPW34SR 8170,9530 r90 top (schematic designator D3)
D3_TIA10 "PIN Photodiode" VBPW34SR 8270,10025 r90 top (schematic designator D3)
D3_TIA11 "PIN Photodiode" VBPW34SR 8230,10520 r90 top (schematic designator D3)
D3_TIA12 "PIN Photodiode" VBPW34SR 8270,11015 r90 top (schematic designator D3)
D3_TIA13 "PIN Photodiode" VBPW34SR 8270,11510 r90 top (schematic designator D3)
D3_TIA14 "PIN Photodiode" VBPW34SR 8270,12005 r90 top (schematic designator D3)
D3_TIA15 "PIN Photodiode" VBPW34SR 8270,12500 r90 top (schematic designator D3)
D3_TIA16 "PIN Photodiode" VBPW34SR 8270,12995 r90 top (schematic designator D3)
D3_TIA17 "PIN Photodiode" VBPW34SR 8270,14610 r90 top (schematic designator D3)
D3_TIA18 "PIN Photodiode" VBPW34SR 8270,15105 r90 top (schematic designator D3)
D3_TIA19 "PIN Photodiode" VBPW34SR 8270,15600 r90 top (schematic designator D3)
D3_TIA20 "PIN Photodiode" VBPW34SR 8290,16095 r90 top (schematic designator D3)
D3_TIA21 "PIN Photodiode" VBPW34SR 8250,16590 r90 top (schematic designator D3)
D3_TIA22 "PIN Photodiode" VBPW34SR 8290,17085 r90 top (schematic designator D3)
D3_TIA23 "PIN Photodiode" VBPW34SR 8290,17580 r90 top (schematic designator D3)
D3_TIA24 "PIN Photodiode" VBPW34SR 8290,18075 r90 top (schematic designator D3)
D3_TIA25 "PIN Photodiode" VBPW34SR 8290,19690 r90 top (schematic designator D3)
D3_TIA26 "PIN Photodiode" VBPW34SR 8290,20185 r90 top (schematic designator D3)
D3_TIA27 "PIN Photodiode" VBPW34SR 8290,20680 r90 top (schematic designator D3)
D3_TIA28 "PIN Photodiode" VBPW34SR 8290,21175 r90 top (schematic designator D3)
D3_TIA29 "PIN Photodiode" VBPW34SR 8290,21670 r90 top (schematic designator D3)
D3_TIA30 "PIN Photodiode" VBPW34SR 8290,22165 r90 top (schematic designator D3)
D3_TIA31 "PIN Photodiode" VBPW34SR 8250,22660 r90 top (schematic designator D3)
D3_TIA32 "PIN Photodiode" VBPW34SR 8290,23155 r90 top (schematic designator D3)
D3_TIA_S33 "PIN Photodiode" VBPW34SR 8530,30850 r90 top (schematic designator D3)
D3_TIA_S34 "PIN Photodiode" VBPW34SR 8530,31345 r90 top (schematic designator D3)
J1 "COAX-F" MCX5.08-H5 9850,3135 r0 top
J2 "COAX-F" MCX5.08-H5 8135,3135 r0 top
P1 "10x2 SMD Header" CON20_2X10_DUA00 8060,2505 r90 top
R1 "330" 0402#2 7580,2795 r0 top
R2 "10K" J1-0603 7610,1090 r0 top
R3 "10K" J1-0603 7100,1090 r0 top
R4 "10K" J1-0603 7270,1090 r0 top
R5 "10K" J1-0603 7440,1090 r0 top
R6 "10K" 0402#2 8510,1365 r0 top
R7 "10K" 0402#2 8340,1365 r0 top
R8 "10K" 0402#2 8025,2000 r0 top
R9 "10K" 0402#2 7090,2000 r0 top
R10_LPF_N1 "1K" J1-0603 7695,26300 r90 top (schematic designator R10)
R10_LPF_N2 "1K" J1-0603 7715,26635 r90 top (schematic designator R10)
R10_LPF_N3 "1K" J1-0603 7715,26970 r90 top (schematic designator R10)
R10_LPF_N4 "1K" J1-0603 7715,27305 r90 top (schematic designator R10)
R10_LPF_P5 "1K" J1-0603 7715,27640 r90 top (schematic designator R10)
R10_LPF_P6 "1K" J1-0603 7715,27975 r90 top (schematic designator R10)
R10_LPF_P7 "1K" J1-0603 7715,28310 r90 top (schematic designator R10)
R10_LPF_P8 "1K" J1-0603 7715,28645 r90 top (schematic designator R10)
R11 "1K" 0402#2 7740,3525 r90 top
R12 "10K" 0402#2 7520,3525 r90 top
R13_SD1 "Opt. Short" 0402#2 12235,29110 r90 top value="0 Ohm" (schematic designator R13)
R13_SD2 "Opt. Short" 0402#2 12455,29565 r90 top value="0 Ohm" (schematic designator R13)
R13_SD3 "Opt. Short" 0402#2 12455,30020 r90 top value="0 Ohm" (schematic designator R13)
R13_SD4 "Opt. Short" 0402#2 12455,30475 r90 top value="0 Ohm" (schematic designator R13)
R14_SD1 "10K" 0402#2 8400,29110 r90 top (schematic designator R14)
R14_SD2 "10K" 0402#2 8460,29565 r90 top (schematic designator R14)
R14_SD3 "10K" 0402#2 8460,30020 r90 top (schematic designator R14)
R14_SD4 "10K" 0402#2 8460,30475 r90 top (schematic designator R14)
R15_SD1 "10K" 0402#2 8840,29110 r90 top (schematic designator R15)
R15_SD2 "10K" 0402#2 8920,29565 r90 top (schematic designator R15)
R15_SD3 "10K" 0402#2 8920,30020 r90 top (schematic designator R15)
R15_SD4 "10K" 0402#2 8920,30475 r90 top (schematic designator R15)
R16_SD1 "10K" 0402#2 9280,29110 r90 top (schematic designator R16)
R16_SD2 "10K" 0402#2 9380,29565 r90 top (schematic designator R16)
R16_SD3 "10K" 0402#2 9380,30020 r90 top (schematic designator R16)
R16_SD4 "10K" 0402#2 9380,30475 r90 top (schematic designator R16)
R17_HP_FILTER1 "50K" 0402#2 8780,24230 r90 top (schematic designator R17)
R17_HP_FILTER2 "50K" 0402#2 8820,24625 r90 top (schematic designator R17)
R17_HP_FILTER3 "50K" 0402#2 8820,25020 r90 top (schematic designator R17)
R17_HP_FILTER4 "50K" 0402#2 8820,25415 r90 top (schematic designator R17)
R18_HP_FILTER1 "Gain" 0402#2 9630,24230 r90 top (schematic designator R18)
R18_HP_FILTER2 "Gain" 0402#2 9690,24625 r90 top (schematic designator R18)
R18_HP_FILTER3 "Gain" 0402#2 9690,25020 r90 top (schematic designator R18)
R18_HP_FILTER4 "Gain" 0402#2 9690,25415 r90 top (schematic designator R18)
R19_HP_FILTER1 "200" 0402#2 7930,24230 r90 top (schematic designator R19)
R19_HP_FILTER2 "200" 0402#2 7950,24625 r90 top (schematic designator R19)
R19_HP_FILTER3 "200" 0402#2 7950,25020 r90 top (schematic designator R19)
R19_HP_FILTER4 "200" 0402#2 7950,25415 r90 top (schematic designator R19)
R20 "10K" 0402#2 7070,1580 r90 top
R21 "10K" 0402#2 7300,1580 r90 top
R22_TIA1 "330" 0402#2 10440,4570 r90 top (schematic designator R22)
R22_TIA2 "330" 0402#2 10580,5065 r90 top (schematic designator R22)
R22_TIA3 "330" 0402#2 10580,5560 r90 top (schematic designator R22)
R22_TIA4 "330" 0402#2 10580,6055 r90 top (schematic designator R22)
R22_TIA5 "330" 0402#2 10580,6550 r90 top (schematic designator R22)
R22_TIA6 "330" 0402#2 10580,7045 r90 top (schematic designator R22)
R22_TIA7 "330" 0402#2 10580,7540 r90 top (schematic designator R22)
R22_TIA8 "330" 0402#2 10580,8035 r90 top (schematic designator R22)
R22_TIA9 "330" 0402#2 10580,9650 r90 top (schematic designator R22)
R22_TIA10 "330" 0402#2 10930,10145 r90 top (schematic designator R22)
R22_TIA11 "330" 0402#2 10790,10640 r90 top (schematic designator R22)
R22_TIA12 "330" 0402#2 10930,11135 r90 top (schematic designator R22)
R22_TIA13 "330" 0402#2 10930,11630 r90 top (schematic designator R22)
R22_TIA14 "330" 0402#2 10930,12125 r90 top (schematic designator R22)
R22_TIA15 "330" 0402#2 10930,12620 r90 top (schematic designator R22)
R22_TIA16 "330" 0402#2 10930,13115 r90 top (schematic designator R22)
R22_TIA17 "330" 0402#2 10930,14730 r90 top (schematic designator R22)
R22_TIA18 "330" 0402#2 10930,15225 r90 top (schematic designator R22)
R22_TIA19 "330" 0402#2 10930,15720 r90 top (schematic designator R22)
R22_TIA20 "330" 0402#2 11000,16215 r90 top (schematic designator R22)
R22_TIA21 "330" 0402#2 10860,16710 r90 top (schematic designator R22)
R22_TIA22 "330" 0402#2 11000,17205 r90 top (schematic designator R22)
R22_TIA23 "330" 0402#2 11000,17700 r90 top (schematic designator R22)
R22_TIA24 "330" 0402#2 11000,18195 r90 top (schematic designator R22)
R22_TIA25 "330" 0402#2 11000,19810 r90 top (schematic designator R22)
R22_TIA26 "330" 0402#2 11000,20305 r90 top (schematic designator R22)
R22_TIA27 "330" 0402#2 11000,20800 r90 top (schematic designator R22)
R22_TIA28 "330" 0402#2 11000,21295 r90 top (schematic designator R22)
R22_TIA29 "330" 0402#2 11000,21790 r90 top (schematic designator R22)
R22_TIA30 "330" 0402#2 11000,22285 r90 top (schematic designator R22)
R22_TIA31 "330" 0402#2 10860,22780 r90 top (schematic designator R22)
R22_TIA32 "330" 0402#2 11000,23275 r90 top (schematic designator R22)
R22_TIA_S33 "330" 0402#2 11840,30970 r90 top (schematic designator R22)
R22_TIA_S34 "330" 0402#2 11840,31465 r90 top (schematic designator R22)
R23_TIA1 "1M" J1-0603 9005,4560 r90 top (schematic designator R23)
R23_TIA2 "1M" J1-0603 9085,5055 r90 top (schematic designator R23)
R23_TIA3 "1M" J1-0603 9085,5550 r90 top (schematic designator R23)
R23_TIA4 "1M" J1-0603 9085,6045 r90 top (schematic designator R23)
R23_TIA5 "1M" J1-0603 9085,6540 r90 top (schematic designator R23)
R23_TIA6 "1M" J1-0603 9085,7035 r90 top (schematic designator R23)
R23_TIA7 "1M" J1-0603 9085,7530 r90 top (schematic designator R23)
R23_TIA8 "1M" J1-0603 9085,8025 r90 top (schematic designator R23)
R23_TIA9 "1M" J1-0603 9085,9640 r90 top (schematic designator R23)
R23_TIA10 "1M" J1-0603 9285,10135 r90 top (schematic designator R23)
R23_TIA11 "1M" J1-0603 9205,10630 r90 top (schematic designator R23)
R23_TIA12 "1M" J1-0603 9285,11125 r90 top (schematic designator R23)
R23_TIA13 "1M" J1-0603 9285,11620 r90 top (schematic designator R23)
R23_TIA14 "1M" J1-0603 9285,12115 r90 top (schematic designator R23)
R23_TIA15 "1M" J1-0603 9285,12610 r90 top (schematic designator R23)
R23_TIA16 "1M" J1-0603 9285,13105 r90 top (schematic designator R23)
R23_TIA17 "1M" J1-0603 9285,14720 r90 top (schematic designator R23)
R23_TIA18 "1M" J1-0603 9285,15215 r90 top (schematic designator R23)
R23_TIA19 "1M" J1-0603 9285,15710 r90 top (schematic designator R23)
R23_TIA20 "1M" J1-0603 9325,16205 r90 top (schematic designator R23)
R23_TIA21 "1M" J1-0603 9245,16700 r90 top (schematic designator R23)
R23_TIA22 "1M" J1-0603 9325,17195 r90 top (schematic designator R23)
R23_TIA23 "1M" J1-0603 9325,17690 r90 top (schematic designator R23)
R23_TIA24 "1M" J1-0603 9325,18185 r90 top (schematic designator R23)
R23_TIA25 "1M" J1-0603 9325,19800 r90 top (schematic designator R23)
R23_TIA26 "1M" J1-0603 9325,20295 r90 top (schematic designator R23)
R23_TIA27 "1M" J1-0603 9325,20790 r90 top (schematic designator R23)
R23_TIA28 "1M" J1-0603 9325,21285 r90 top (schematic designator R23)
R23_TIA29 "1M" J1-0603 9325,21780 r90 top (schematic designator R23)
R23_TIA30 "1M" J1-0603 9325,22275 r90 top (schematic designator R23)
R23_TIA31 "1M" J1-0603 9245,22770 r90 top (schematic designator R23)
R23_TIA32 "1M" J1-0603 9325,23265 r90 top (schematic designator R23)
R23_TIA_S33 "1M" J1-0603 9805,30960 r90 top (schematic designator R23)
R23_TIA_S34 "1M" J1-0603 9805,31455 r90 top (schematic designator R23)
R24 "100" 0402#2 9250,3255 r90 top
R25 "1M" 0402#2 9480,3255 r90 top
R26 "1Ohm" J1-0603 9025,3245 r90 top
R27 "1M" 0402#2 7760,3255 r90 top
R28 "1m" 14-1210 7135,3235 r0 top
R29_LED_Signal_Mux1 "Optional 10K" 0402#2 10510,4065 r90 top value=Open (schematic designator R29)
R29_LED_Signal_Mux2 "Optional 10K" 0402#2 10570,9145 r90 top value=Open (schematic designator R29)
R29_LED_Signal_Mux3 "Optional 10K" 0402#2 10570,14225 r90 top value=Open (schematic designator R29)
R29_LED_Signal_Mux4 "Optional 10K" 0402#2 10570,19305 r90 top value=Open (schematic designator R29)
R29_LED_Signal_Mux5 "Optional 10K" 0402#2 10570,25965 r90 top value=Open (schematic designator R29)
R29_TIA_Signal_Mux1 "Optional 10K" 0402#2 10480,8585 r90 top value=Open (schematic designator R29)
R29_TIA_Signal_Mux2 "Optional 10K" 0402#2 10540,13665 r90 top value=Open (schematic designator R29)
R29_TIA_Signal_Mux3 "Optional 10K" 0402#2 10540,18745 r90 top value=Open (schematic designator R29)
R29_TIA_Signal_Mux4 "Optional 10K" 0402#2 10540,23825 r90 top value=Open (schematic designator R29)
R29_TIA_Signal_Mux5 "Optional 10K" 0402#2 10540,32015 r90 top value=Open (schematic designator R29)
U1 "LP5900" DFN220X250X80-7N 7785,2765 r0 top
U3 "ADR391" SOT-23-5_95P290X160-5N 7945,1365 r0 top
U4 "DAC7562" SOP10-50P300X300-10N 7460,1810 r90 top
U5 "MCP6546" SOT-23-5_95P290X160-5N 7315,3545 r0 top
U6_SD1 "AD8613" SOP-65P200X125-5N 11860,29055 r90 top (schematic designator U6)
U6_SD2 "AD8613" SOP-65P200X125-5N 12060,29510 r90 top (schematic designator U6)